# Altium PCB 0001 EnergyMeter.PcbDoc
Units mm, origin at the board's own origin, x right, y up, seen from the top; angles counter-clockwise.
Board outline 45 x 26 mm, 2 copper layers (Top Layer, Bottom Layer); 47 components, 32 nets, 176 pads, 0 vias.
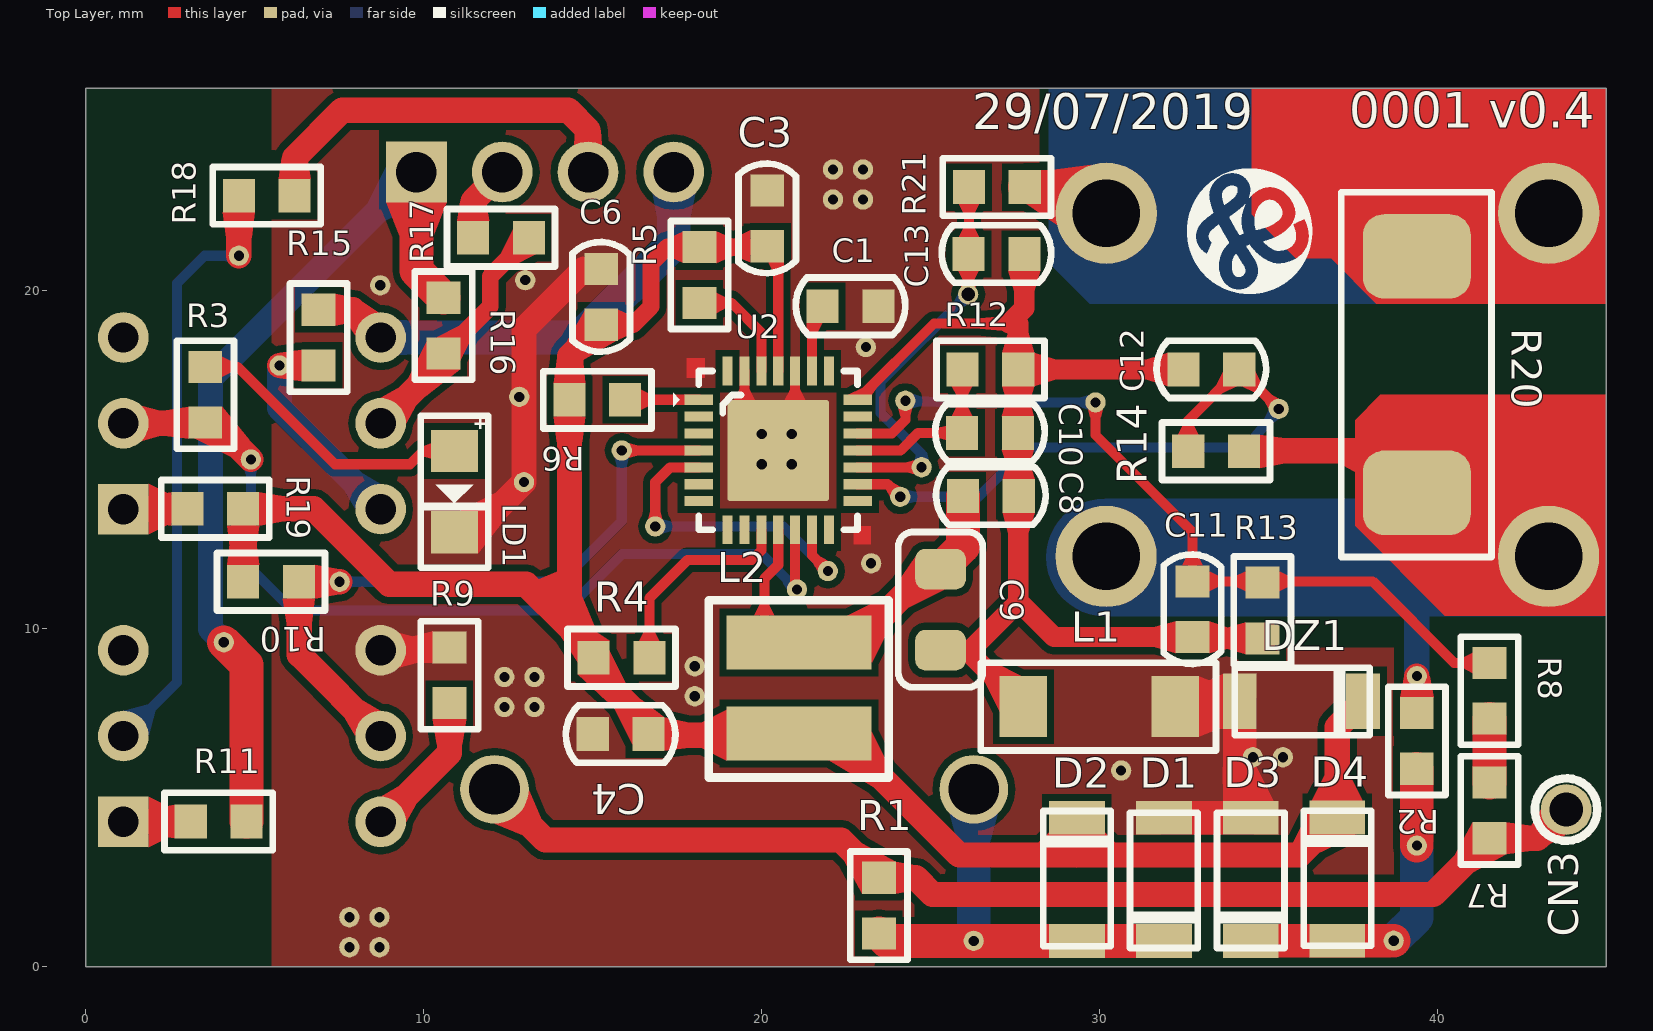
[diagram p0: Top Layer view]
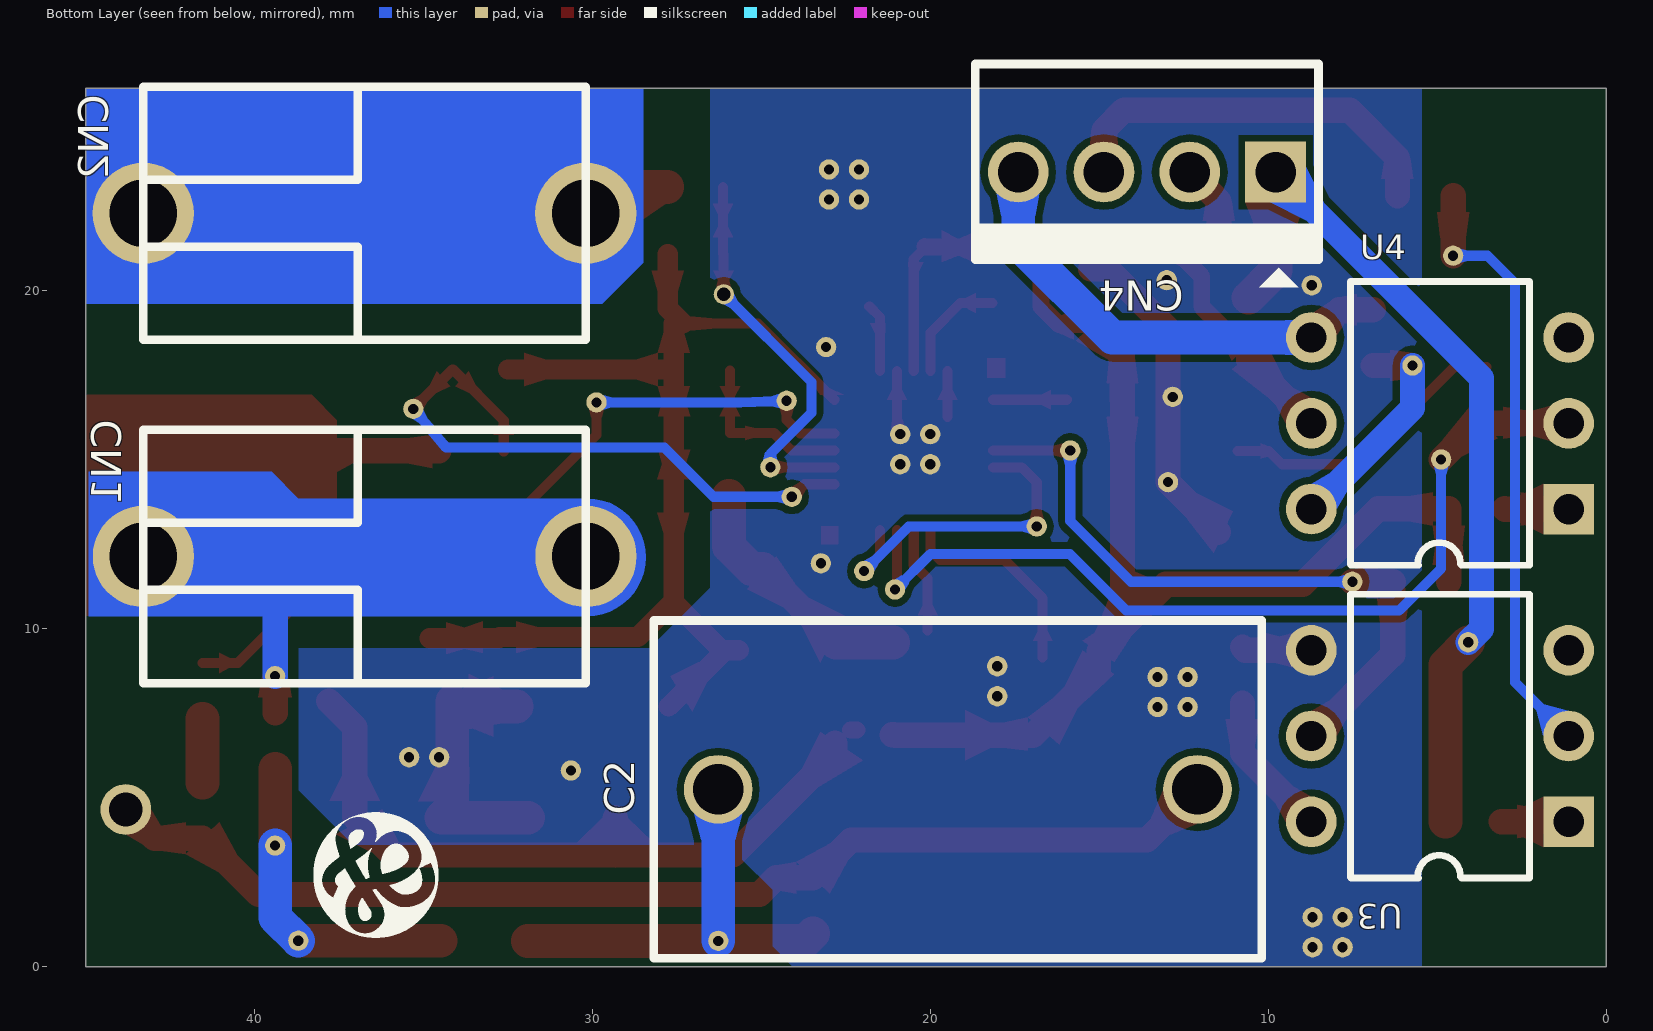
[diagram p1: Bottom Layer view, seen from below]

## Layer stack, top to bottom
Top Solder: solder mask 0.0102, Solder Resist, Dk 3.5
Top Layer: signal copper 0.0356
Dielectric1: dielectric 0.32, FR-4, Dk 4.8
Bottom Layer: signal copper 0.0356
Bottom Solder: solder mask 0.0102, Solder Resist, Dk 3.5

## Board outline
0,0 0,26 45,26 45,0

## Design rules (kind name [scope] priority, off if disabled: settings)
Clearance [All] p1: gap=0.21 ignorepadtopadclearanceinfootprint=FALSE
Height [All] p1: minheight=0 maxheight=50 prefheight=12.7
HoleSize [All] p1: absolutevalues=TRUE maxlimit=10.54 minlimit=0.025 maxpercent=80.000 minpercent=20.000
PasteMaskExpansion [All] p1: expansion=-1
PlaneClearance [All] p1: clearance=0.3
PlaneConnect [All] p1: planeconnectstyle=Direct reliefexpansion=0.508 reliefentries=4 reliefconductorwidth=0.254 reliefairgap=0.254
PolygonConnect [All] p1: connectstyle=Direct reliefconductorwidth=0.254 reliefentries=4 polygonreliefangle="45 Angle" airgapwidth=0.254
RoutingVias [All] p1: holewidth=0.4 width=0.8 viastyle="Through Hole" minholewidth=0.4 minwidth=0.8 maxholewidth=0.711 maxwidth=1.27
SilkToSolderMaskClearance SilkscreenOverComponentPads [IsPad] p1: minsilkscreentomaskgap=0.254 clearancetoexposedcopper=TRUE
SolderMaskExpansion [All] p1: expansion=0.102
UnConnectedPin [All] p1:
UnRoutedNet [All] p1: checkbadconnections=TRUE
Width [All] p1: maxlimit=10 minlimit=0.203 preferedwidth=0.3
23 further rules are at their usual default settings.

## Components (designator, comment, footprint, x,y, rotation, side; value= is the part's Value field where it differs from the comment)
C1 "Capacitor Cerâmico SMD" "0603 - CAP - montagem na maquina" 22.635,19.545 r180 top
C2 "02.0032" "cap 470nF / 275V~" 12.094,5.245 r0 bottom
C3 "Capacitor Cerâmico SMD" "0603 - CAP - montagem na maquina" 20.168,22.149 r270 top
C4 "Capacitor Cerâmico SMD" "0603 - CAP - montagem na maquina" 15.828,6.883 r0 top
C6 "Capacitor Cerâmico SMD" "0603 - CAP - montagem na maquina" 15.257,19.825 r270 top
C8 "Capacitor Cerâmico SMD" "0603 - CAP - montagem na maquina" 26.788,13.932 r180 top
C9 "Capacitor Cerâmico SMD" 0805(cap) 25.298,10.566 r90 top
C10 "Capacitor Cerâmico SMD" "0603 - CAP - montagem na maquina" 26.763,15.799 r180 top
C11 "Capacitor Cerâmico SMD" "0603 - CAP - montagem na maquina" 32.757,10.579 r90 top
C12 "Capacitor Cerâmico SMD" "0603 - CAP - montagem na maquina" 33.316,17.678 r0 top
C13 "Capacitor Cerâmico SMD" "0603 - CAP - montagem na maquina" 26.953,21.095 r180 top
CN1 "5mm" "FASTON FEMALE 180G" 43.298,12.141 r180 bottom
CN2 "5mm" "FASTON FEMALE 180G" 43.305,22.301 r180 bottom
CN3 "##nl" Testpoint-1mm 43.819,4.648 r90 top
CN4 "11.0417" PCMC2-04 13.593,23.52 r0 bottom
D1 "Diode" DIODE_SMD_2mm 31.935,2.578 r270 top value=value
D2 "Diode" DIODE_SMD_2mm 29.316,2.578 r90 top value=value
D3 "Diode" DIODE_SMD_2mm 34.505,2.578 r270 top value=value
D4 "Diode" DIODE_SMD_2mm 37.024,2.591 r90 top value=value
DZ1 "Zener Diode" DIODE_SMD_2mm 35.983,7.874 r0 top value=3V3
L1 "03.0045" "1806 ind WURTH" 30.281,7.061 r180 top
L2 "03.0105" 744031100 23.761,5.596 r180 top
LD1 "LED2" "LED 0805" 10.909,14.059 r270 top
R1 "Res3" "0603 - MONTAGEM MÁQUINA" 23.474,1.803 r270 top
R2 "Res3" "0603 - MONTAGEM MÁQUINA" 39.399,6.68 r270 top
R3 "Res3" "0603 - MONTAGEM MÁQUINA" 3.535,16.929 r270 top
R4 "Res3" "0603 - MONTAGEM MÁQUINA" 15.854,9.144 r0 top
R5 "Res3" "0603 - MONTAGEM MÁQUINA" 18.161,20.472 r270 top
R6 "Res3" "0603 - MONTAGEM MÁQUINA" 15.138,16.777 r0 top
R7 "Res3" "0603 - MONTAGEM MÁQUINA" 41.548,4.623 r90 top
R8 "Res3" "0603 - MONTAGEM MÁQUINA" 41.548,8.164 r90 top
R9 "Res3" "0603 - MONTAGEM MÁQUINA" 10.761,8.623 r90 top
R10 "Res3" "0603 - MONTAGEM MÁQUINA" 5.477,11.392 r0 top
R11 "Res3" "0603 - MONTAGEM MÁQUINA" 3.928,4.293 r180 top
R12 "Res3" "0603 - MONTAGEM MÁQUINA" 26.775,17.678 r180 top
R13 "Res3" "0603 - MONTAGEM MÁQUINA" 34.827,10.541 r90 top
R14 "Res3" "0603 - MONTAGEM MÁQUINA" 33.456,15.253 r180 top
R15 "Res3" "0603 - MONTAGEM MÁQUINA" 6.887,18.618 r270 top
R16 "Res3" "0603 - MONTAGEM MÁQUINA" 10.583,18.974 r270 top
R17 "Res3" "0603 - MONTAGEM MÁQUINA" 12.285,21.577 r0 top
R18 "Res3" "0603 - MONTAGEM MÁQUINA" 5.351,22.822 r180 top
R19 "Res3" "0603 - MONTAGEM MÁQUINA" 3.827,13.551 r180 top
R20 "Res3" 2512 39.399,17.526 r270 top
R21 "Res3" "0603 - MONTAGEM MÁQUINA" 26.966,23.076 r180 top
U2 "07.1140" "QFN 5x5" 18.144,16.779 r0 top
U3 "07.0195" "DIP 6 BRANCO M SUFFIX" 4.915,6.824 r90 bottom
U4 "07.0195" "DIP 6 BRANCO M SUFFIX" 4.915,16.083 r90 bottom

## Footprints (in the part's own frame and the unit in brackets; to place one, negate y for a bottom-side part, rotate by r counter-clockwise, add the part's x,y. Pads: shape width x height; smd on the part's side, far side on the other; paste and mask are expansions set on the pad)
"0603 - CAP - montagem na maquina" [mm] "Chip Capacitor, 2-Leads, Body 1,6x0,8mm, IPC Medium Density"
  rect 0.95x1 smd: 1(-0.825,0) 2(0.825,0)
  silkscreen extent -1.62,-0.85 1.62,0.85, body extent -0.89,-0.48 0.89,0.48, height 0.6
"0603 - MONTAGEM MÁQUINA" [mm] "Chip Resistor, 2-Leads, Body 1,6x0,8mm, IPC Medium Density"
  rect 0.95x1 smd: 1(-0.825,0) 2(0.825,0)
  silkscreen extent -1.6,-0.85 1.6,0.85, body extent -0.89,-0.48 0.89,0.48, height 0.6
0805(cap) [mm]
  rrect50% 1.2x1.5 smd mask+0.127: 1(-1.2,0) 2(1.2,0)
  silkscreen extent -2.3,-1.25 2.3,1.25, body extent -1.03,-0.64 0.98,0.64, height 0.6
"1806 ind WURTH" [mm] "1806 ind WURTH"
  rect 1.4x1.8 smd: 1(-1.971,-0.635) 2(2.529,-0.635)
  silkscreen extent -3.17,-1.93 3.8,0.66, body extent -2.08,-1.55 2.56,0.28, height 0.75
2512 [mm] "Resistor"
  rrect50% 2.5x3.2 smd: 1(-3.5,0) 2(3.5,0)
  silkscreen extent -5.4,-2.24 5.4,2.21, body extent -3.35,-1.63 3.38,1.63, height 0.75
744031100 [mm]
  rect 4.3x1.6 smd: 1(2.65,-4) 2(2.65,-1.3)
  silkscreen extent 0,-5.25 5.33,0, body extent 0.75,-4.52 4.55,-0.72, height 1.65
"cap 470nF / 275V~" [mil] "Capacitor Poliester 470nF / 275V~"
  round 80 hole 59.06: 1(0,0) 2(558.66,0)
  silkscreen extent -75,-197 634,197, body extent -75,-197 632,197, height 748
DIODE_SMD_2mm [mm] "Diodo 2x4mm Cilindrico"
  rect 1x1.65 smd: 1(-1.825,-0.02) 2(1.825,-0.02)
  silkscreen extent -1.97,-1.05 2.03,0.98, body extent -1.78,-1.07 1.9,0.99, height 2.2
"DIP 6 BRANCO M SUFFIX" [mm] "DIP 6 BRANCO M SUFFIX"
  rect 1.5x1.5 hole 0.9: 1(-2.54,-3.81)
  round 1.5 hole 0.9: 2(0,-3.81) 3(2.54,-3.81) 4(2.54,3.81) 5(0,3.81) 6(-2.54,3.81)
  silkscreen extent -4.2,-2.65 4.2,2.65, body extent -4.2,-3.85 4.17,3.85, height 4.33
"FASTON FEMALE 180G" [mm] "FASTON FEMALE 180º; PN: 1217107-1"
  round 3 hole 2: 1(0,0) 1(13.1,0)
  silkscreen extent 0,-3.75 13.1,3.75, body extent 0,-3.74 13.1,3.75, height 3
"LED 0805" [mm] "LED 0805"
  rect 1.25x1.4 smd: 1(-1.2,0) 2(1.2,0)
  silkscreen extent -2.25,-1 2.25,1, body extent -1.05,-0.67 1.05,0.67, height 0.75
PCMC2-04 [mm]
  rect 1.8x1.8 hole 1.2: 1(-3.81,0)
  round 1.8 hole 1.2: 2(-1.27,0) 3(1.27,0) 4(3.81,0)
  silkscreen extent -5.08,-3.2 5.08,2.6, body extent -5.08,-3.2 5.08,2.6, height 11.4
"QFN 5x5" [mm]
  rect 0.85x0.3 smd: 1(0,0) 2(0,-0.5) 3(0,-1) 4(0,-1.5) 5(0,-2) 6(0,-2.5) 7(0,-3) 15(4.7,-3) 16(4.7,-2.5) 17(4.7,-2) 18(4.7,-1.5) 19(4.7,-1) 20(4.7,-0.5) 21(4.7,0)
  rect 0.3x0.85 smd: 8(0.85,-3.85) 9(1.35,-3.85) 10(1.85,-3.85) 11(2.35,-3.85) 12(2.85,-3.85) 13(3.35,-3.85) 14(3.85,-3.85) 22(3.85,0.85) 23(3.35,0.85) 24(2.85,0.85) 25(2.35,0.85) 26(1.85,0.85) 27(1.35,0.85) 28(0.85,0.85)
  rrect5% 3x3 smd: 29(2.35,-1.5)
  silkscreen extent -0.76,-3.85 4.7,0.85, body extent 0,-3.85 4.7,0.85, height 1
Testpoint-1mm [mm]
  round 1.5 hole 1: 1(0,0)
  silkscreen extent -0.92,-0.92 0.92,0.92

## Part data
C2: library part "cap 220nF / 400V", "Capacitor de Poliéster - MKP", cod.=128081, Grupo=02, Valor=470nF/275V~
CN1 CN2: library part "FASTON FEMEA 180G", "Faston Fêmea 90graus", cod.=89240
CN3: library part TESTPOINT, "Testpoint"
CN4: library part PCMC2-04, "Conector header", cod.=52312, Encapsulamento="2,54mm - 180º", Fabricante=METALTEX, Grupo=11, Part Number=PCMC2-04, Valor="4 vias"
D1 D2 D3 D4: "Default Diode", PackageDocument=Sep-1996, Part Number=FDLL4148, Code_JEDEC=DO-214-AB, LatestRevisionDate=17-Jul-2002, LatestRevisionNote="Re-released for DXP Platform.", PackageReference=SMC
DZ1: library part "Diode Zener", Part Number=MMSZ5231B, LatestRevisionDate=17-Jul-2002, LatestRevisionNote="Re-released for DXP Platform.", PackageReference=SOD123
L1: library part "742 792 43", "Indutor", Part Number=74279243, cod.=87011, Datasheet=\\SERVIDOR\Arquivo\Eletronica\Componentes\74476604.pdf, Encapsulamento=1806, Fabricante="WURTH ELEKTRONIK", Fornecedor=BEVIAN, Valor=75R/3A
L2: library part "744 031 101", "Indutor", Part Number="744 031 474", cod.=122021, Datasheet=\\SERVIDOR\Arquivo\Eletronica\Componentes\74476604.pdf, Fabricante="WURTH ELEKTRONIK", Fornecedor=BEVIAN, Valor=100uH/250mA
LD1: "Led", cod.=190020, Encapsulamento=0805, Grupo=09, Valor="LED AZUL"
R1 R2 R3 R4 R5 R6 R7 R8 R9 R10 R11 R12 R13 R14 R15 R16 R17 R18 R19 R20 R21: "Resistor", Grupo=01
  R1: cod.=185200, Valor=1M
  R2: Valor=10R
  R3: cod.=185250, Valor=3k3
  R4 R5: cod.=185070, Valor=4k7
  R6 R18: Encapsulamento=0603, Valor=10R
  R7 R8: Valor=499k/1%
  R9 R15: Cod. Savage=185050, Encapsulamento=0603, Valor=1M
  R10 R11 R16 R19: Cod. Savage=185050, Encapsulamento=0603, Valor=1k
  R12 R13 R14 R21: Valor=1k/1%
  R17: Encapsulamento=0603, Valor=1k
  R20: Encapsulamento=1206, Valor="SHUNT 2mR"
U2: library part MCP39F501, "Energy Meter", Fabricante=Microchip, Grupo=07, Part Number=MCP39F501
U3 U4: library part "OPTO 4N25-M", "Optoacoplador(Branco)", Part Number=4N25-M, Encapsulamento=DIP-6, Fabricante=FAIRCHILD, Fornecedor=INTERTEK, Grupo=07
C1 C3 C6 C8 C11: cod.=186030, Valor=100nF
C4: cod.=186030, Valor=10uF
C9: cod.=?????, Valor=10uF
C10 C12 C13: cod.=186230, Valor=33nF

## Free pads (board coordinates)
  round 0.6 hole 0.3: 2(4.081,9.601) 2(4.526,21.044) 2(4.881,15.011) 2(5.731,17.793) 2(7.51,11.392) 2(7.798,0.572) 2(7.798,1.46) 2(8.687,0.572) 2(8.687,1.46) 2(8.712,20.168) 2(12.386,7.683) 2(12.386,8.572) 2(12.827,16.866) 2(12.967,14.341) 2(13.005,20.32) 2(13.275,7.683) 2(13.275,8.572) 2(15.862,15.279) 2(16.853,13.03) 2(18.021,8.001) 2(18.021,8.89) 2(20.006,14.872) 2(20.006,15.761) 2(20.895,14.872) 2(20.895,15.761) 2(21.048,11.163) 2(21.962,11.709) 2(22.115,22.708) 2(22.115,23.597) 2(23.004,22.708) 2(23.004,23.597) 2(23.089,18.339) 2(23.245,11.938) 2(24.105,13.906) 2(24.257,16.751) 2(24.74,14.783) 2(26.28,0.762) 2(29.887,16.7) 2(30.645,5.804) 2(34.544,6.198) 2(35.309,16.51) 2(35.433,6.198) 2(38.714,0.766) 2(39.399,3.581) 2(39.399,8.598)
  round 0.6 hole 0.4: 2(26.115,19.901)

## Nets (pads, with @x,y where several pads share a name; then routed paths per layer and width w, separated by ;. In a path a pad name is that pad's centre, name@x,y a point inside that pad or via, vN(x,y) a via of type N, cw(c..) or ccw(c..) an arc to the next point about the centre after c; other vN are vias at no path point)
3V3: C3.2 C4.2 C6.2 D2.2 D4.2 DZ1.2 L2.2 R4.1 R5.1 R6.1 R10.1 R19.1 U2.25 | length 62.4
  Top Layer w0.3: C6.2@15.105,18.848 C6.2 ; C3.2@20.295,21.146 20.494,20.947 U2.25
  Top Layer w0.5: C6.2 16.193,19 16.726,19.533 16.726,20.815 17.209,21.297 R5.1 20.141,21.297 C3.2 ; L2.2@22.165,6.998 L2.2@22.369,6.998
  Top Layer w0.75: R10.1 R19.1 6.748,13.551 8.983,11.316 13.034,11.316 14.313,10.036 ; R4.1@15.003,9.347 14.313,10.036 ; R4.1 15.029,8.775 16.958,6.845 L2.2@21.061,6.845 ; C6.2@15.105,18.848 14.326,18.069 14.326,16.789 R6.1 14.313,10.036 ; L2.2@21.073,6.858 L2.2@21.137,6.858 ; L2.2@22.826,6.617 22.826,6.325 25.848,3.302 29.336,3.302 ; D2.2 29.336,3.302 ; DZ1.2 37.045,7.09 D4.2 35.931,3.302 29.336,3.302
3V3.B: CN4.1 pad.2@4.081,9.601 R11.1 R16.1 | length 26.2
  Top Layer w1: pad.2@4.081,9.601 4.753,8.929 R11.1 ; CN4.1 9.783,20.599 R16.1
  Bottom Layer w0.75: pad.2@4.081,9.601 3.687,9.995 3.687,17.424 CN4.1
AGND: C8.1 C9.1 C10.1 C11.1 C12.1 C13.1 L1.2 R12.1 R13.1 U2.21 | length 33.4
  Top Layer w0.3: U2.21 25.103,19.038 27.334,19.038
  Top Layer w0.6: C9.1@25.671,9.366 26.081,9.366 ; 27.334,19.038 27.778,19.482 C13.1 ; 27.601,19.038 R12.1 ; L1.2 26.081,9.366 ; C12.1@32.509,17.678 R12.1 ; R13.1 32.795,9.716 C11.1 28.663,9.754 27.618,10.8 27.601,10.782 ; 26.081,9.366 26.185,9.366 27.601,10.782 ; 27.601,10.782 R12.1
EARTH: C1.1 C3.1 C4.1 C6.1 D1.1 D3.1 DZ1.1 L1.1 LD1.2 pad.2@7.798,0.572 pad.2@7.798,1.46 pad.2@8.687,0.572 pad.2@8.687,1.46 pad.2@8.712,20.168 pad.2@12.386,7.683 pad.2@12.386,8.572 pad.2@12.827,16.866 pad.2@12.967,14.341 pad.2@13.005,20.32 pad.2@13.275,7.683 pad.2@13.275,8.572 pad.2@18.021,8.001 pad.2@18.021,8.89 pad.2@20.006,14.872 pad.2@20.006,15.761 pad.2@20.895,14.872 pad.2@20.895,15.761 pad.2@22.115,22.708 pad.2@22.115,23.597 pad.2@23.004,22.708 pad.2@23.004,23.597 pad.2@23.089,18.339 pad.2@23.245,11.938 pad.2@30.645,5.804 pad.2@34.544,6.198 pad.2@35.433,6.198 R9.2 U2.24 U2.27 U2.29 U3.4 | length 23.1
  Top Layer w0.3: U2.29@19.494,16.278 U2.27 ; U2.29@20.994,15.779 U2.24
  Top Layer w0.75: U3.4 10.677,9.364 R9.2 ; LD1.2@11.485,12.859 12.967,14.341 12.967,18.872 14.744,20.65 C6.1
  Top Layer w1: D1.1 D3.1 34.158,4.73 DZ1.1 34,7.696 L1.1
FASE: C2.1 CN3.1 R1.1 R7.1 | length 34.1
  Top Layer w0.75: C2.1 13.593,3.746 22.355,3.746 R1.1 24.566,2.628 25.061,2.134 39.884,2.134 R7.1 42.968,3.798 CN3.1
GND.B: CN4.4 R15.1 U4.4 | length 13.8
  Top Layer w0.75: R15.1 7.904,19.443 U4.4
  Bottom Layer w1: U4.4 14.613,18.623 17.403,21.412 CN4.4@17.403,23.247
NetC1_2: C1.2 U2.23 | length 2
  Top Layer w0.3: U2.23 21.494,19.229 C1.2
NetC2_2: C2.2 D1.2 D2.1 pad.2@26.28,0.762 R1.2 | length 13
  Top Layer w1: R1.2 23.699,0.753 D2.1 D1.2
  Bottom Layer w1: pad.2@26.28,0.762 26.284,0.766 C2.2
NetC8_2: C8.2 C9.2 L2.1 U2.11 | length 10.7
  Top Layer w0.3: L2.1@20.083,9.944 20.083,11.481 20.494,11.892 U2.11
  Top Layer w0.75: L2.1@22.804,9.596 C9.2@24.974,11.766
  Top Layer w1: L2.1 L2.1@22.804,9.596 ; C9.2@24.974,11.766 C9.2 25.963,12.431 C8.2
NetC10_2: C10.2 R12.2 U2.18 | length 5.2
  Top Layer w0.3: U2.18 24.118,15.279 24.638,15.799 25.671,15.799 C10.2 R12.2@25.938,17.645
NetC11_2: C11.2 pad.2@24.257,16.751 pad.2@29.887,16.7 R8.2 R13.2 U2.19 | length 24.1
  Top Layer w0.3: U2.19 23.856,15.779 24.257,16.18 pad.2@24.257,16.751 ; pad.2@29.887,16.7 29.887,15.735 32.757,12.865 C11.2 38.092,11.404 40.507,8.989 R8.2
  Bottom Layer w0.3: pad.2@24.257,16.751 25.633,16.7 pad.2@29.887,16.7
NetC12_2: C12.2 pad.2@24.105,13.906 pad.2@35.309,16.51 R14.2 U2.16 | length 18.5
  Top Layer w0.3: U2.16 23.732,14.279 pad.2@24.105,13.906 ; R14.2 32.631,16.168 C12.2 pad.2@35.309,16.51
  Bottom Layer w0.3: pad.2@24.105,13.906 26.42,13.906 27.88,15.367 34.345,15.367 pad.2@35.309,16.51
NetC13_2: C13.2 pad.2@24.74,14.783 pad.2@26.115,19.901 R21.2 U2.17 | length 11.8
  Top Layer w0.3: U2.17 pad.2@24.74,14.783 ; pad.2@26.115,19.901 26.128,19.914 C13.2 26.141,21.107 R21.2
  Bottom Layer w0.3: pad.2@24.74,14.783 24.74,15.176 23.52,16.396 23.52,17.306 pad.2@26.115,19.901
NetCN4_2: CN4.2 R17.1 | length 2.3
  Top Layer w0.75: R17.1 11.46,22.657 CN4.2
NetCN4_3: CN4.3 R18.1 | length 11.9
  Top Layer w0.75: R18.1 6.176,23.939 7.586,25.349 14.279,25.349 14.863,24.765 CN4.3
NetD3_2: D3.2 D4.1 pad.2@38.714,0.766 pad.2@39.399,3.581 R2.2 | length 9.6
  Top Layer w1: D3.2@34.501,0.766 D4.1 pad.2@38.714,0.766 ; pad.2@39.399,3.581 R2.2
  Bottom Layer w1: pad.2@38.714,0.766 39.399,1.452 pad.2@39.399,3.581
NetLD1_1: LD1.1 R3.1 | length 8.7
  Top Layer w0.3: R3.1 4.488,17.754 7.37,14.872 9.592,14.872 9.98,15.259 LD1.1
NetR3_2: pad.2@4.881,15.011 pad.2@21.048,11.163 R3.2 U2.12 U4.2 | length 27
  Top Layer w0.3: U2.12 20.994,11.459 pad.2@21.018,11.161
  Top Layer w0.75: U4.2 3.513,16.083 R3.2 3.788,16.104 pad.2@4.881,15.011
  Bottom Layer w0.3: pad.2@4.881,15.011 4.881,11.786 6.125,10.541 14.202,10.541 15.87,12.209 20.002,12.209 pad.2@21.048,11.163
NetR4_2: R4.2 U2.10 | length 6.3
  Top Layer w0.3: R4.2 16.679,10.903 17.815,12.04 19.714,12.04 19.994,12.319 U2.10
NetR5_2: R5.2 U2.26 | length 3.3
  Top Layer w0.3: R5.2 19.113,19.647 19.994,18.767 U2.26
NetR6_2: R6.2 U2.1 | length 2.2
  Top Layer w0.3: R6.2@15.963,16.779 U2.1
NetR7_2: R7.2 R8.1 | length 1.9
  Top Layer w1: R7.2 R8.1
NetR9_1: R9.1 U3.6 | length 4.4
  Top Layer w0.75: U3.6 10.761,6.32 R9.1
NetR10_2: pad.2@7.51,11.392 pad.2@15.862,15.279 R10.2 U2.4 U3.5 | length 20
  Top Layer w0.3: pad.2@15.862,15.279 U2.4
  Top Layer w0.75: R10.2 pad.2@7.51,11.392 ; R10.2@6.316,11.138 6.316,9.234 U3.5
  Bottom Layer w0.3: pad.2@7.51,11.392 14.063,11.392 15.862,13.191 pad.2@15.862,15.279
NetR11_2: R11.2 U3.1 | length 2
  Top Layer w0.75: U3.1 3.095,4.284 R11.2
NetR15_2: pad.2@5.731,17.793 R15.2 U4.6 | length 6.6
  Top Layer w0.75: pad.2@5.731,17.793 R15.2
  Bottom Layer w0.75: pad.2@5.731,17.793 5.731,16.537 U4.6
NetR16_2: R16.2 R17.2 U4.5 | length 7.3
  Top Layer w0.5: R16.2 11.967,19.533 11.967,20.435 R17.2
  Top Layer w0.75: U4.5 10.583,17.941 R16.2
NetR18_2: pad.2@4.526,21.044 R18.2 U3.2 | length 18
  Top Layer w0.75: pad.2@4.526,21.044 R18.2
  Bottom Layer w0.3: U3.2 2.696,8.416 2.696,20.231 3.51,21.044 pad.2@4.526,21.044
NetR19_2: R19.2 U4.1 | length 1.9
  Top Layer w0.75: U4.1 2.993,13.543 R19.2
NetU2_5: pad.2@16.853,13.03 pad.2@21.962,11.709 U2.5 U2.13 | length 9.9
  Top Layer w0.3: pad.2@16.853,13.03 16.853,14.338 17.293,14.779 U2.5 ; U2.13 21.494,12.178 pad.2@21.962,11.709
  Bottom Layer w0.3: pad.2@16.853,13.03 20.641,13.03 pad.2@21.962,11.709
NEUTRO_IN: CN1.1 pad.2@39.399,8.598 R2.1 R14.1 R20.2 | length 17.5
  Top Layer w0.75: R14.1@34.547,15.271 40.169,15.271 CN1.1@43.298,12.141 ; R2.1 pad.2@39.399,8.598
  Bottom Layer w0.75: pad.2@39.399,8.598 39.399,10.617 ; 39.679,10.808 41.33,12.459 CN1.1@43.298,12.459
NEUTRO_OUT: CN2.1 R20.1 R21.1 | length 6.9
  Top Layer w1: R21.1 29.43,23.076 CN2.1@30.205,22.301 ; 35.602,22.695 36.521,21.775 R20.1@39.361,21.775
pads on no net: U2.2 U2.3 U2.6 U2.7 U2.8 U2.9 U2.14 U2.15 U2.20 U2.22 U2.28 U3.3 U4.3

## Polygon pours and split planes (outlines as drawn)
EARTH on Bottom Layer "NONET_L-01_P-001" (solid, remove dead copper, pour order 9): 5.448,26 5.448,0 24.07,0 24.674,0.603 24.674,2.273 26.004,3.604 37.088,3.604 38.701,5.217 38.701,9.423 28.312,9.423 26.522,11.214 26.522,26
EARTH on Top Layer "NONET_L-01_P-001" (solid, pour order 13): 5.499,26 5.499,0 24.02,0 24.515,0.495 24.515,1.854 25.017,2.356 38.714,2.356 38.714,9.436 30.044,9.436 28.223,11.257 28.223,26

## Other copper
Top Layer:
  rectangle net EARTH: 22.722,12.497 23.245,13.043
  rectangle net EARTH: 17.783,17.424 18.33,18.01
  region net NEUTRO_IN: 40.225,10.389 37.57,13.043 37.571,16.18 38.316,16.926 44.994,16.926 44.994,10.389
  region net NEUTRO_OUT: 34.516,26 34.517,22.269 35.818,20.968 36.859,20.968 38.202,19.625 45,19.625 45,26
  text "'.Layer_Name'" at 10.351,-3.785 h2
Bottom Layer:
  region net NEUTRO_IN: 44.911,14.643 39.501,14.643 38.714,13.856 32.77,13.856 30.166,13.856 ccw(c30.166,12.116) 30.166,10.376 44.911,10.376
  region net NEUTRO_OUT: 28.503,26 28.503,20.838 29.715,19.625 45,19.624 45,26
  text "'.Layer_Name'" at 10.351,-3.785 h2

## Silkscreen, mask and mechanical layers (free items; w line width, h text height)
Top Overlay:
  drawing of 2528 lines, arcs and shapes, not listed
  text "0001 v0.4" at 37.393,24.473 h1.8
  text "29/07/2019" at 26.242,24.435 h1.8
Bottom Overlay:
  drawing of 2529 lines, arcs and shapes, not listed
Mechanical 1:
  the board outline again, w0.254

## Dimensions
0,0 to 45,0 on Mechanical 13
0,0 to 0,26 on Mechanical 13